# Altium PCB TK522_LV-Trafo.PcbDoc
Units mm, origin at the board's own origin, x right, y up, seen from the top; angles counter-clockwise.
Board outline 70 x 80 mm, 4 copper layers (TopLayer, InternalPlane1, InternalPlane2, BottomLayer); 5 components, 4 nets, 20 pads, 0 vias.
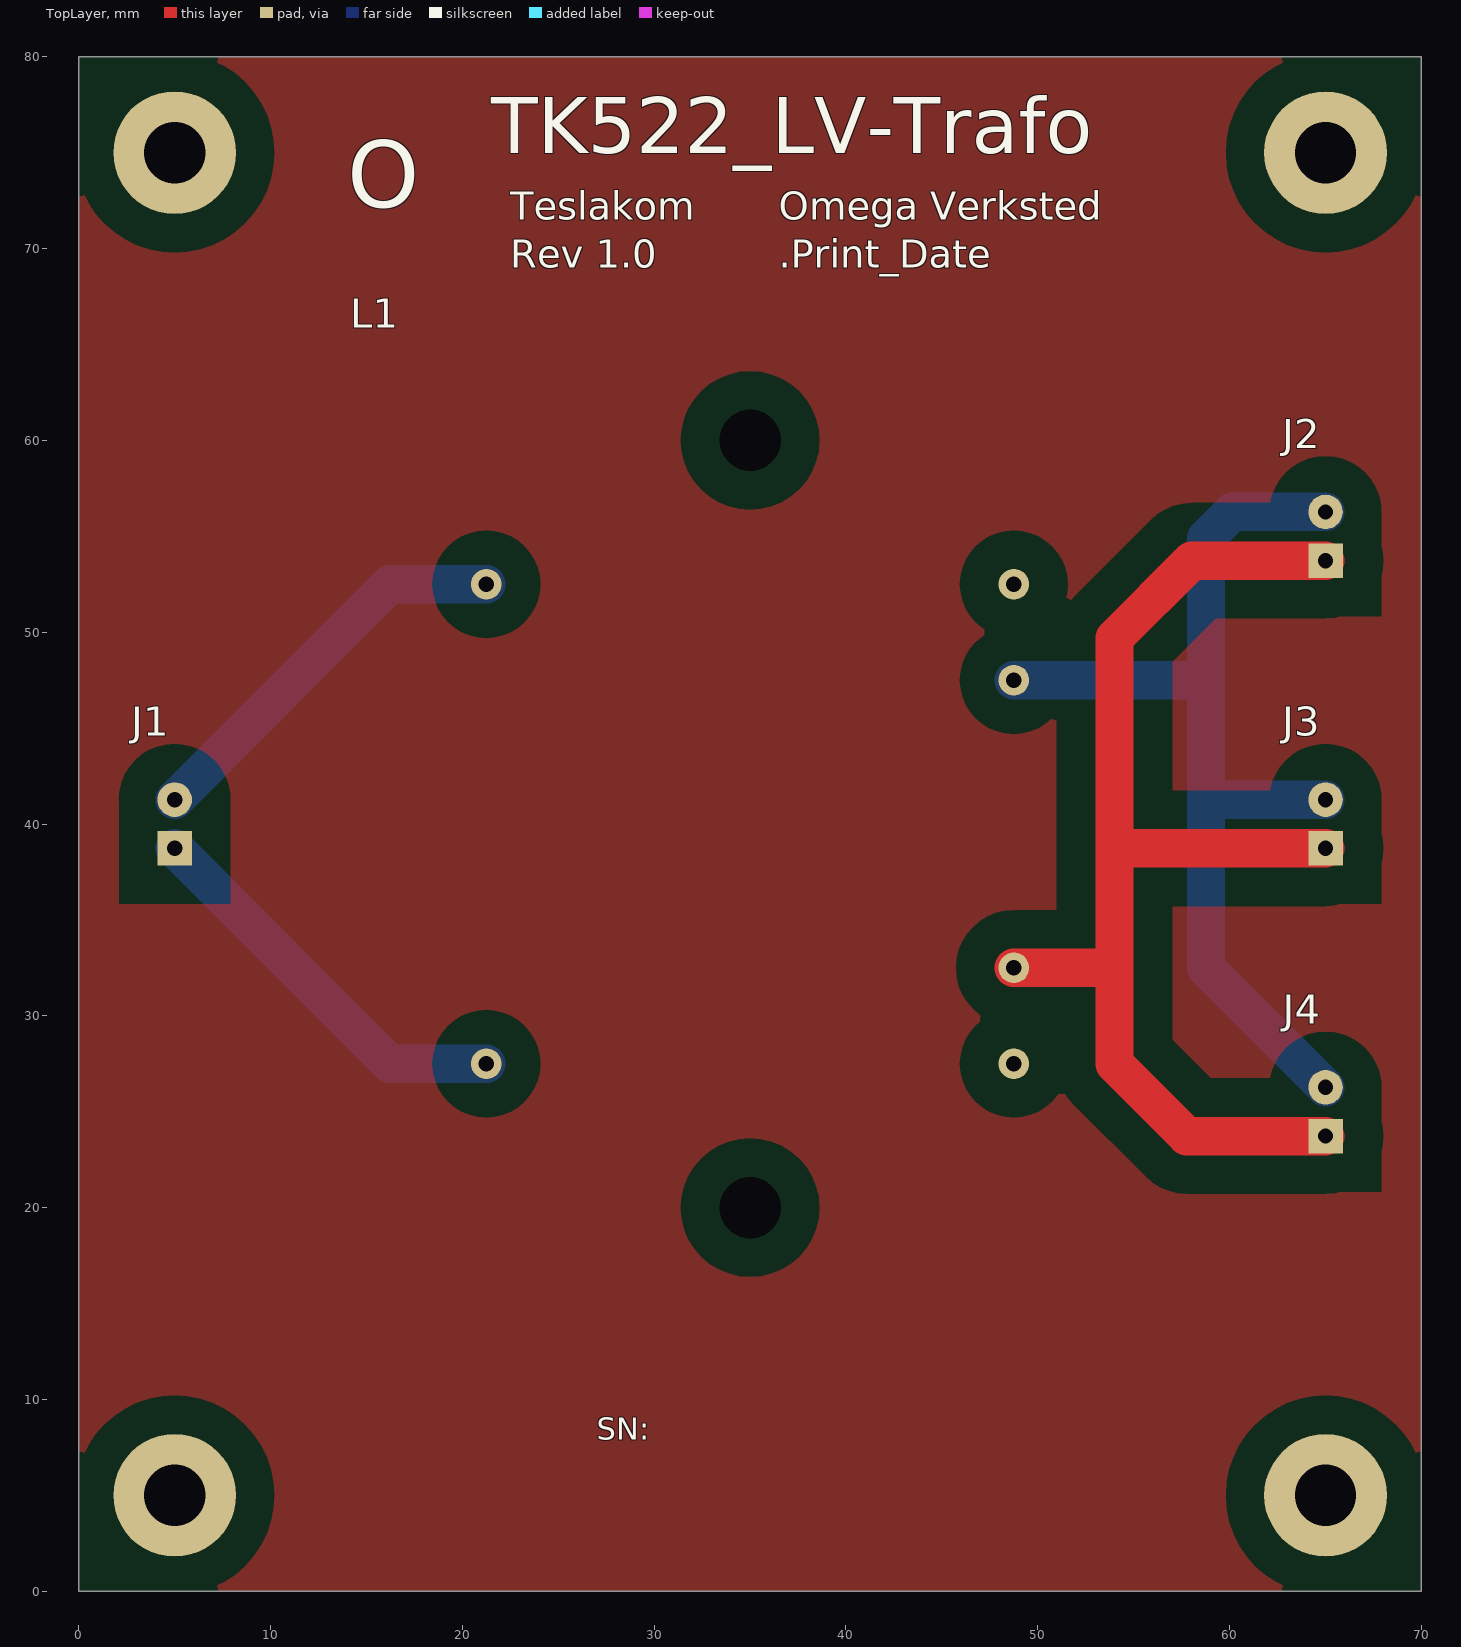
[diagram p0: TopLayer view]
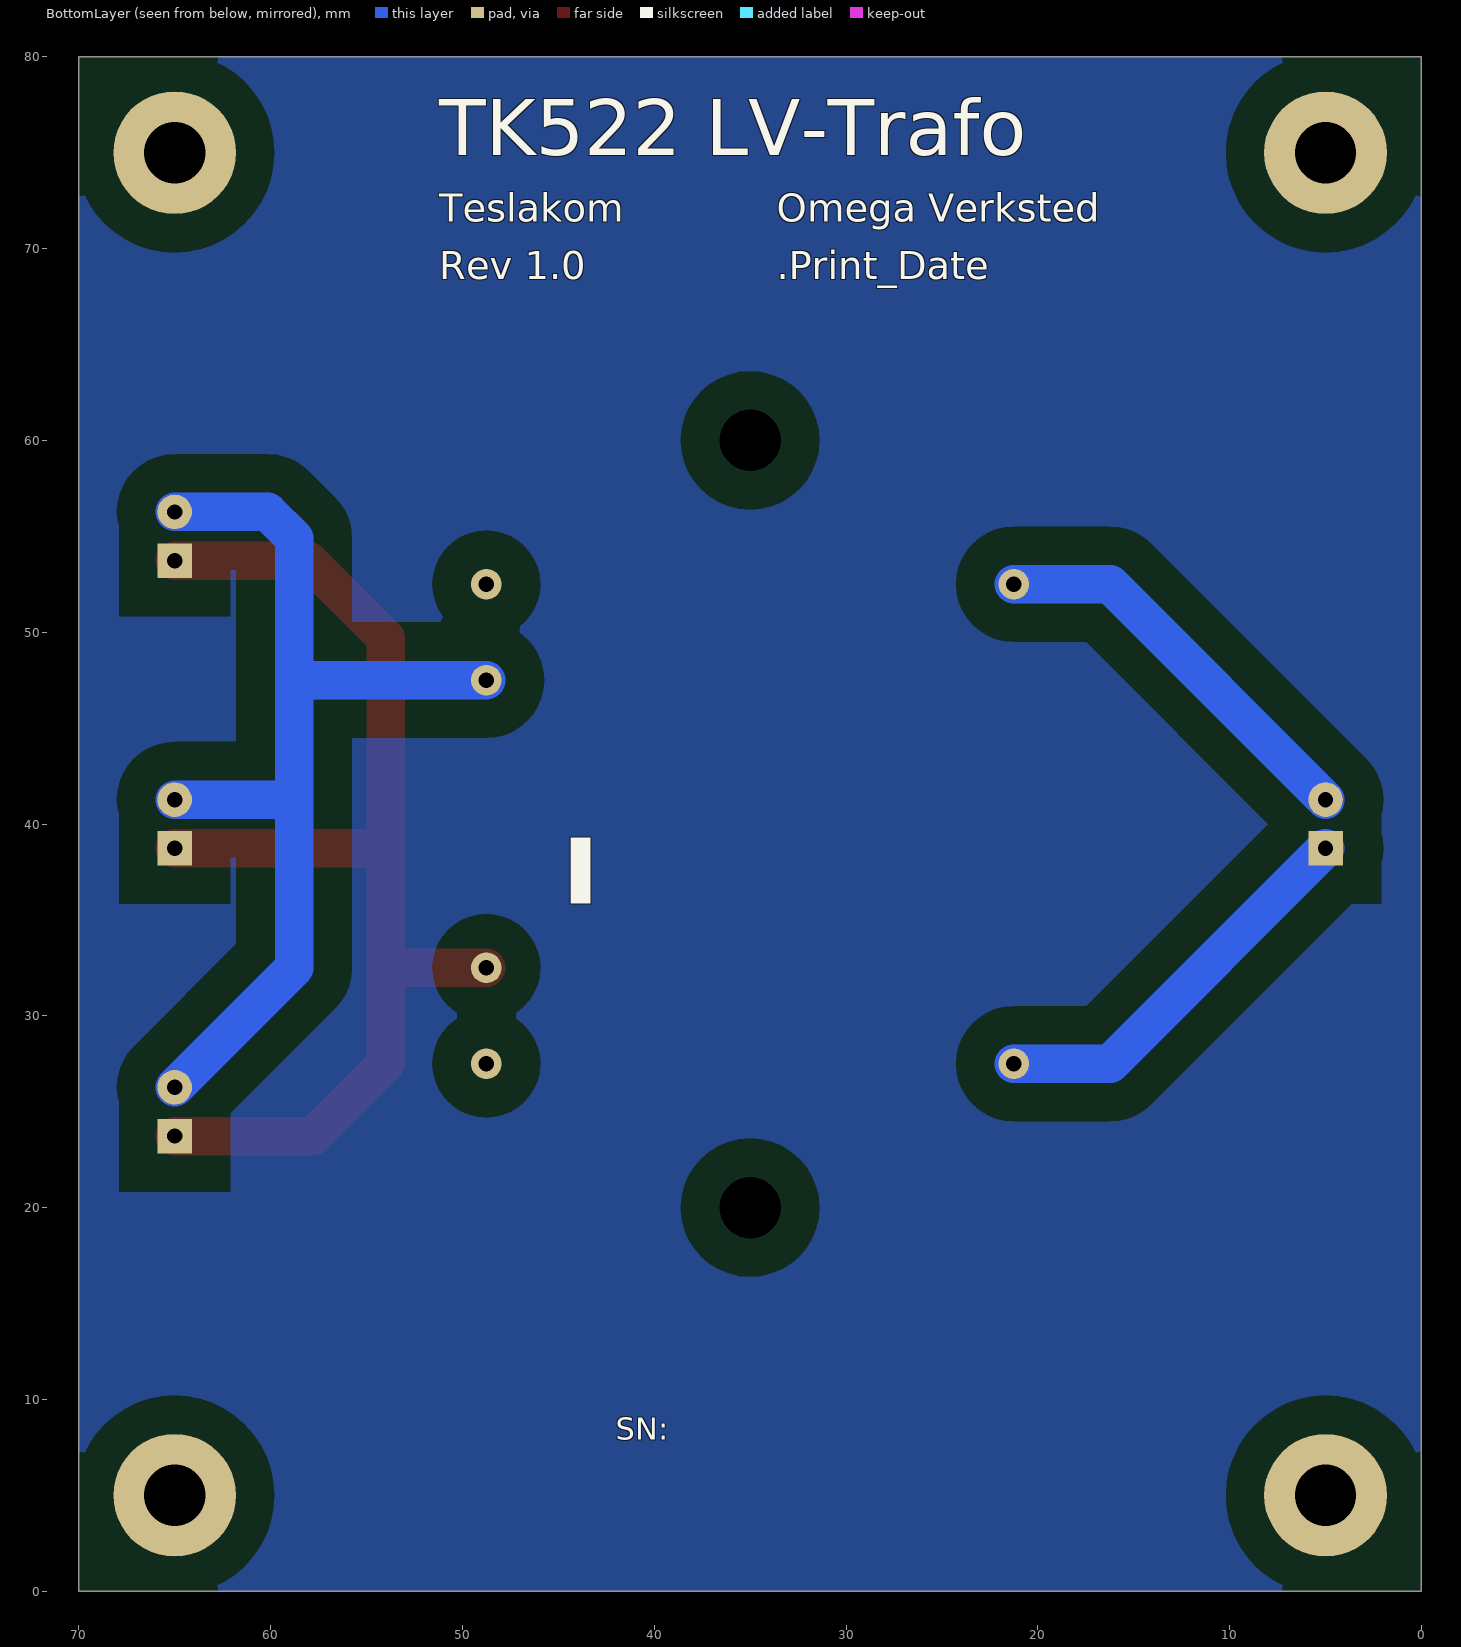
[diagram p1: BottomLayer view, seen from below]
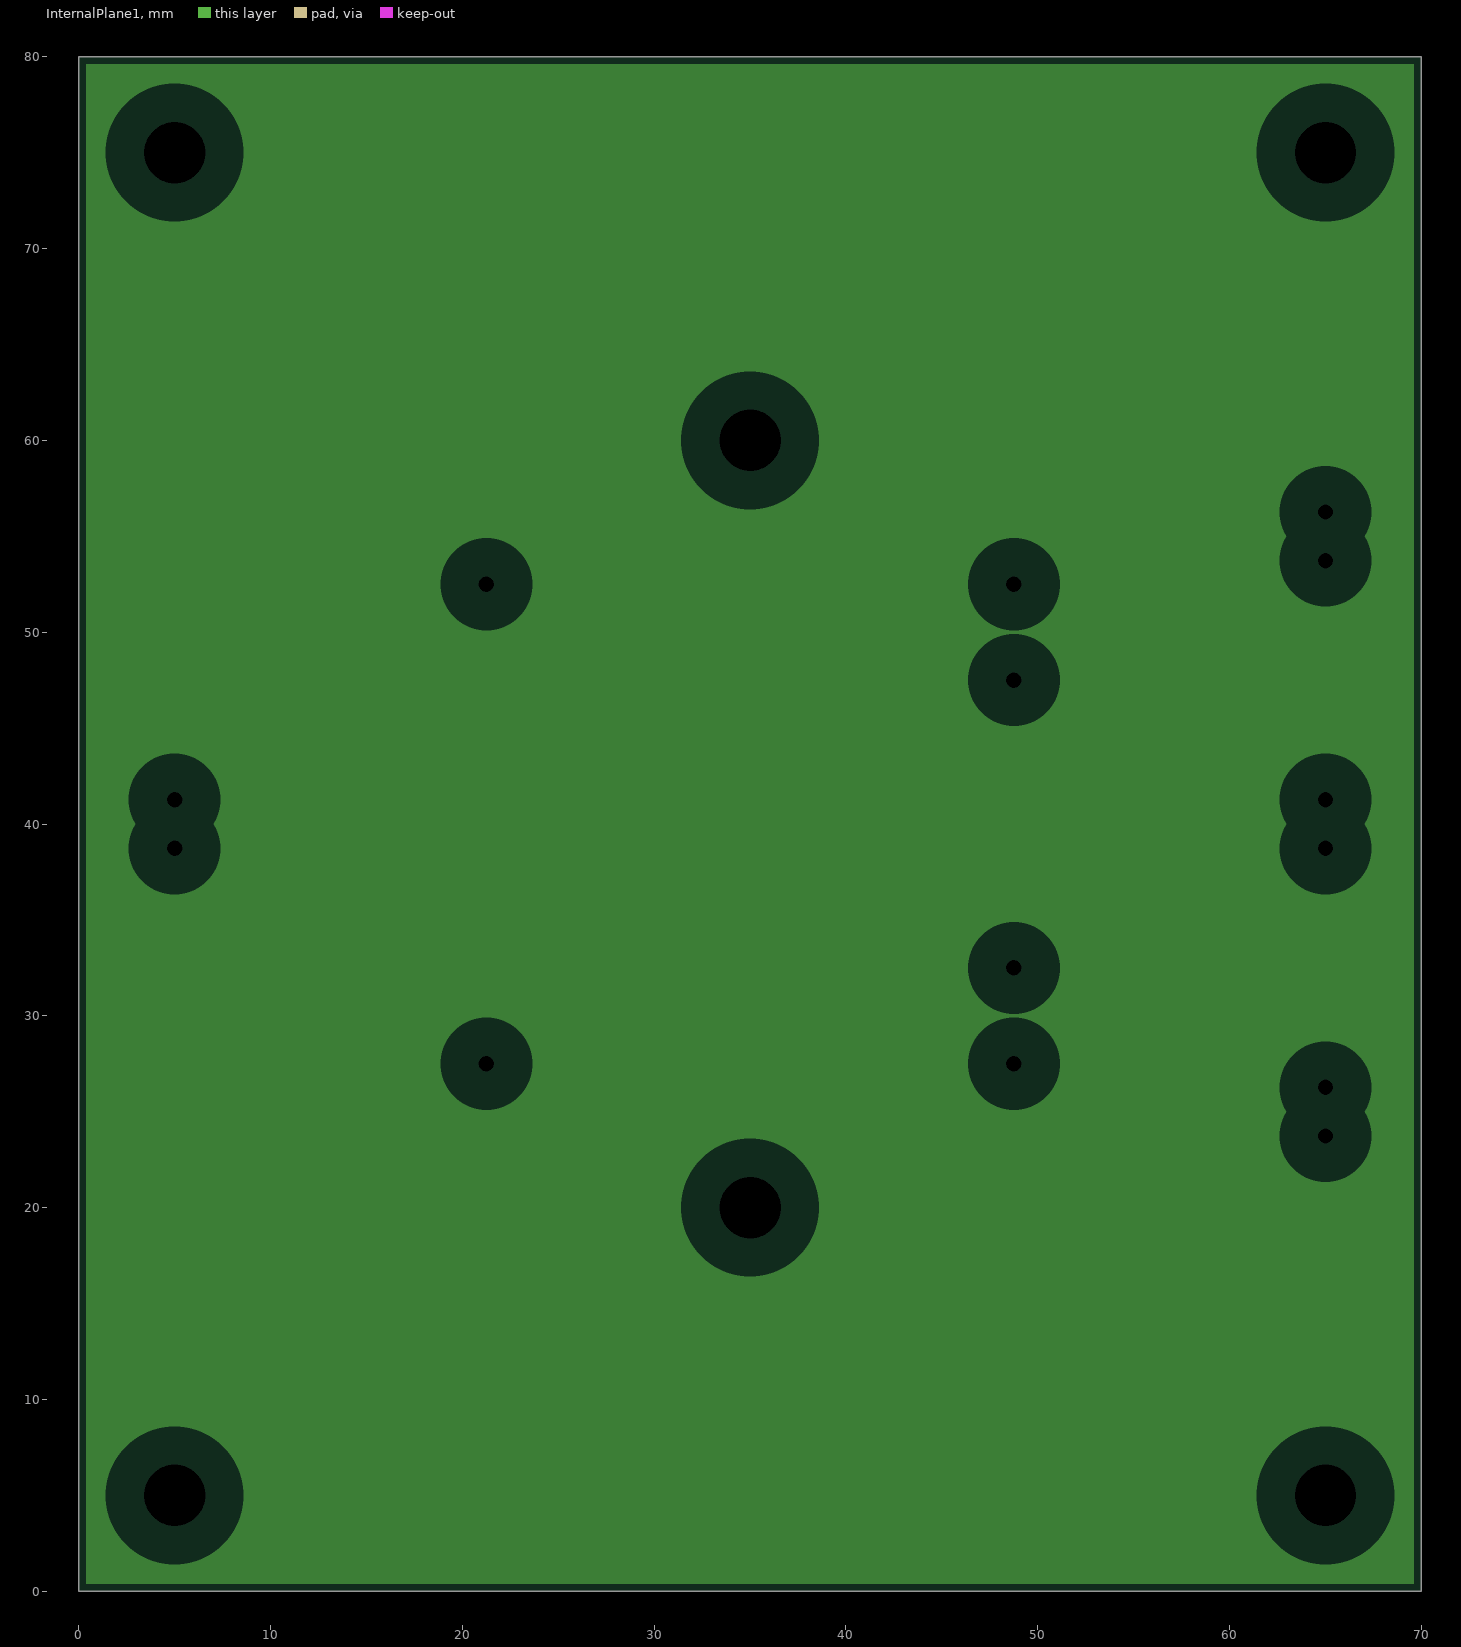
[diagram p2: InternalPlane1, clearances drawn from the general rule]
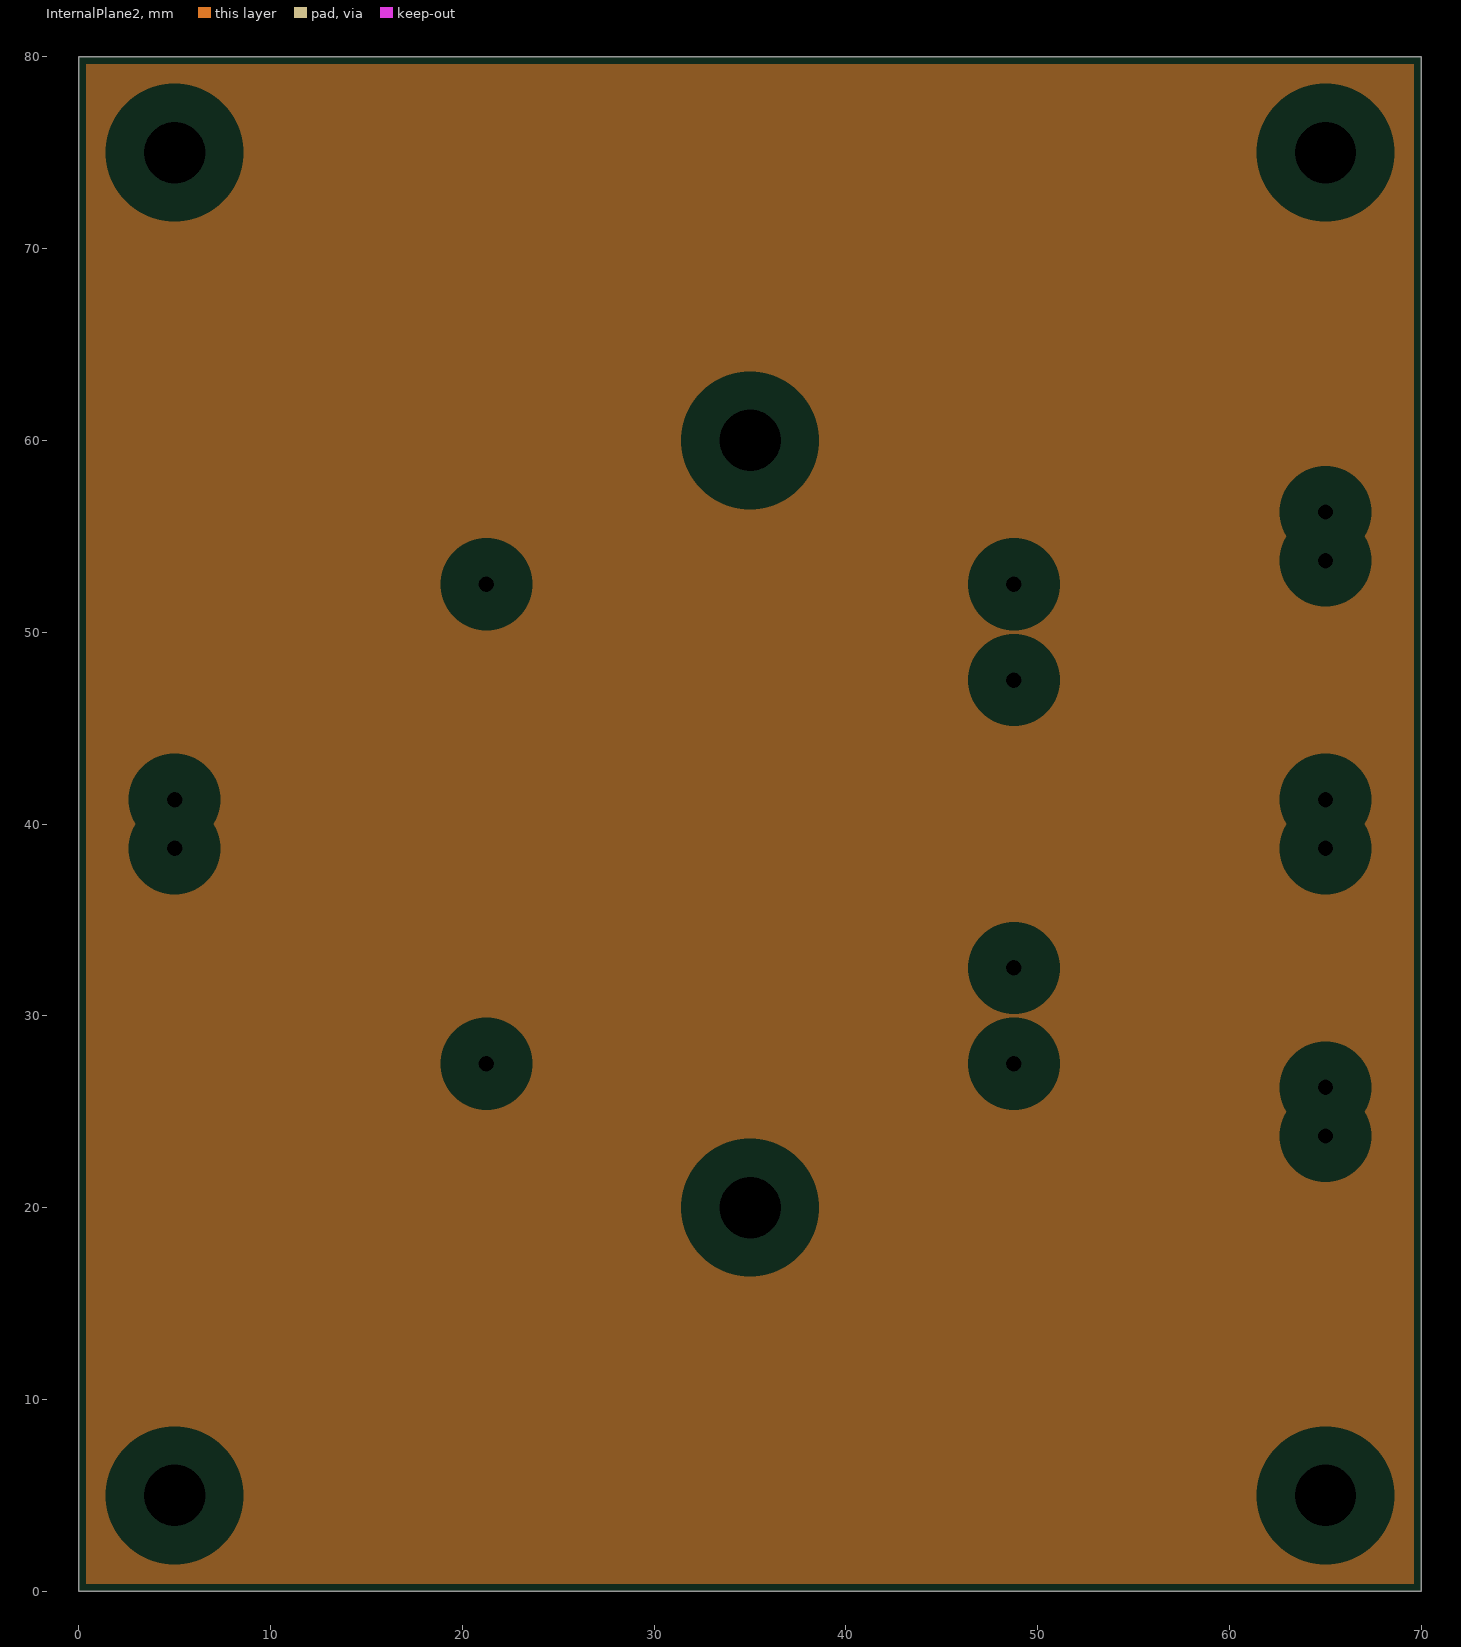
[diagram p3: InternalPlane2, clearances drawn from the general rule]
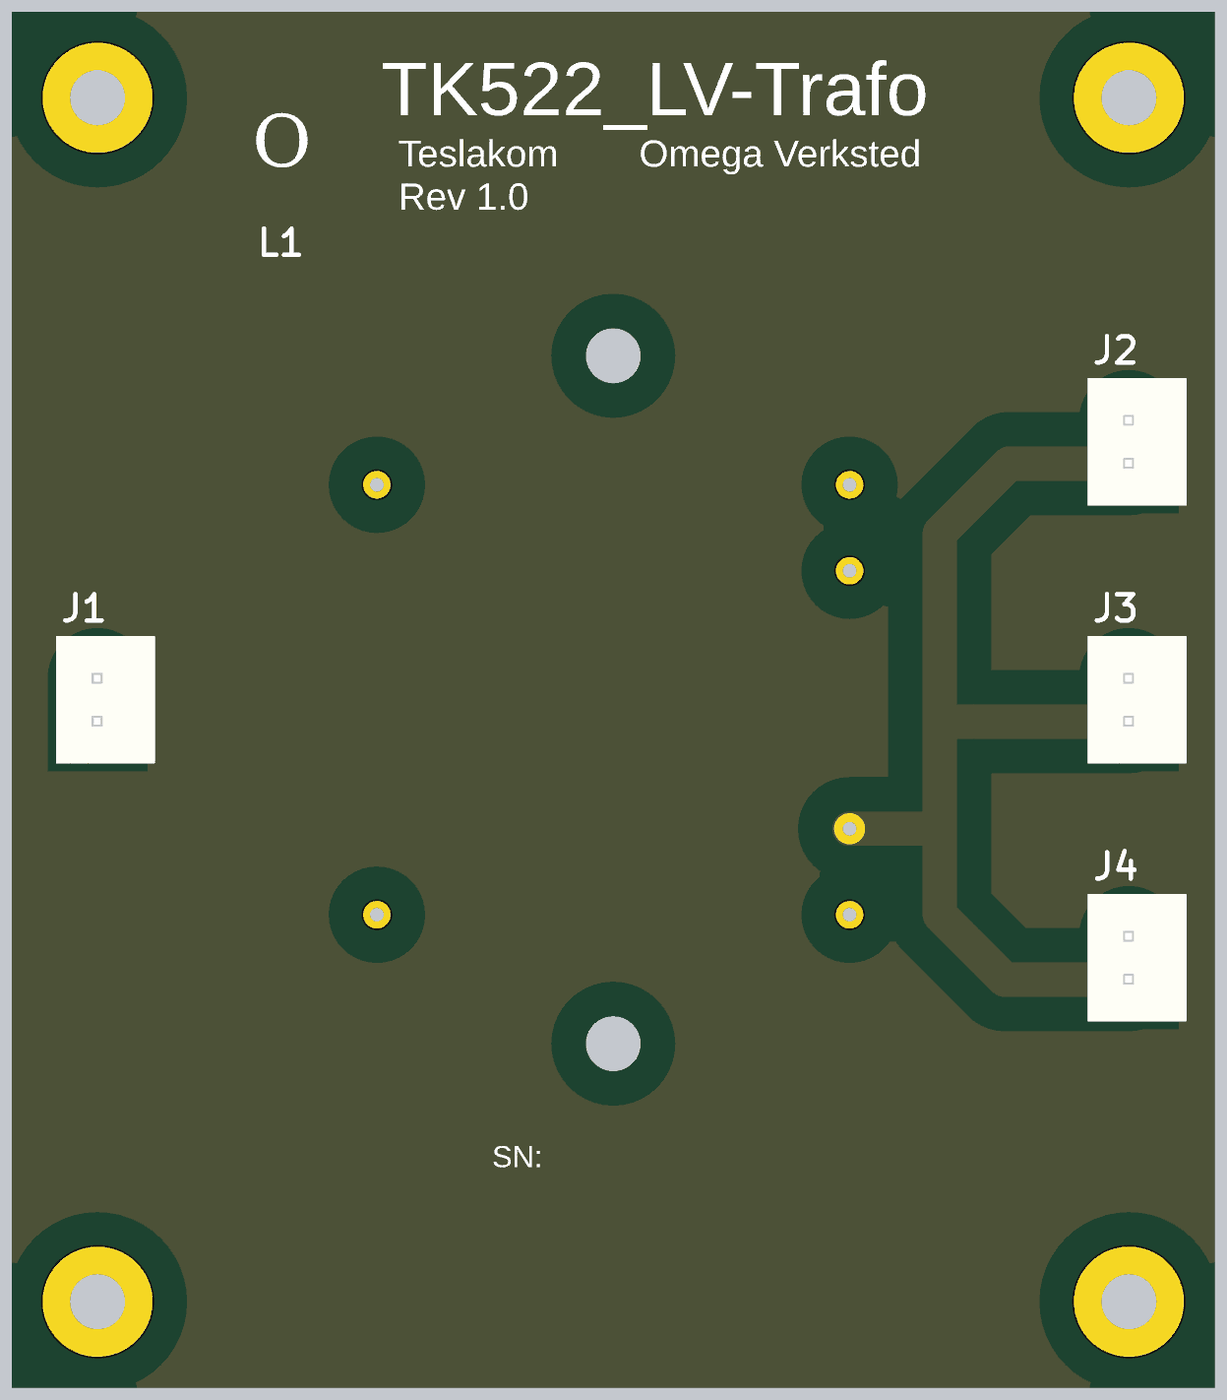
[diagram p4: 3D render of the assembled board from above, using the file's embedded part models]

## Layer stack, top to bottom
TopSolder: solder mask 0.0102, Solder Resist, Dk 3.5
TopLayer: signal copper 0.0178
Dielectric1: core 0.32, FR-4, Dk 4.8
InternalPlane1: plane copper 0.0356
Dielectric2: prepreg 0.32, FR-4, Dk 4.8
InternalPlane2: plane copper 0.0356
Dielectric3: core 0.32, FR-4, Dk 4.8
BottomLayer: signal copper 0.0178
BottomSolder: solder mask 0.0102, Solder Resist, Dk 3.5

## Board outline
0,0 0,80 70,80 70,0

## Design rules (kind name [scope] priority, off if disabled: settings)
Clearance [All] p1: gap=2 ignorepadtopadclearanceinfootprint=FALSE except(0: Arc-Text Arc-Hole Track-Text Track-Hole SMDPad-Text SMDPad-Hole THPad-Text THPad-Hole Via-Text Via-Hole Fill-Text Fill-Hole Poly-Text Poly-Hole Region-Text Region-Hole Text-Text Text-Hole; 0.2: Arc-Arc Arc-Track Arc-THPad Arc-Via Track-Track Track-THPad Track-Via THPad-THPad)
Height [All] p1: minheight=0 maxheight=200 prefheight=12.7
HoleSize [All] p1: absolutevalues=TRUE maxlimit=6.35 minlimit=0.3 maxpercent=80.000 minpercent=20.000
MinimumSolderMaskSliver [All] p1: minsoldermaskwidth=0.1
PlaneClearance [All] p1: clearance=2
PlaneConnect [All] p1: planeconnectstyle=Relief reliefexpansion=0.508 reliefentries=4 reliefconductorwidth=1 reliefairgap=0.254
PolygonConnect TheBestRule [IsVia AND InNet('GND')] p1: connectstyle=Direct reliefconductorwidth=0.4 reliefentries=4 polygonreliefangle="90 Angle" airgapwidth=0.2
PolygonConnect [All] p2: connectstyle=Relief reliefconductorwidth=0.6 reliefentries=4 polygonreliefangle="90 Angle" airgapwidth=0.2
RoutingVias [All] p1: holewidth=0.711 width=1.27 viastyle="Through Hole" minholewidth=0.711 minwidth=1.27 maxholewidth=0.711 maxwidth=1.27
SilkToSolderMaskClearance [IsPad] p1: minsilkscreentomaskgap=0.178 clearancetoexposedcopper=TRUE
SolderMaskExpansion [All] p1: expansion=0.102
Width [All] p1: maxlimit=10 minlimit=0.16 preferedwidth=0.4
24 further rules are at their usual default settings.

## Classes and differential pairs
component class TK522_LV-Trafo: J2 J3 J4 L1

## Components (designator, comment, footprint, x,y, rotation, side; value= is the part's Value field where it differs from the comment)
J1 "B2B-XH-A (LF)(SN)" JST_2P 5,40 r0 top
J2 "B2B-XH-A (LF)(SN)" JST_2P 65,55 r0 top
J3 "B2B-XH-A (LF)(SN)" JST_2P 65,40 r0 top
J4 "B2B-XH-A (LF)(SN)" JST_2P 65,25 r0 top
L1 "navn" "44268 MYRRA TRANSFORMER" 35,40 r90 top

## Footprints (in the part's own frame and the unit in brackets; to place one, negate y for a bottom-side part, rotate by r counter-clockwise, add the part's x,y. Pads: shape width x height; smd on the part's side, far side on the other; paste and mask are expansions set on the pad)
"44268 MYRRA TRANSFORMER" [mm]
  round 1.6 hole 0.8: 1(-12.5,13.75) 6(12.5,13.75) 7(12.5,-13.75) 8(7.5,-13.75) 11(-7.5,-13.75) 12(-12.5,-13.75)
  round 2.5 hole 3.2 unplated: ""(-20,0)
  round 0 hole 3.2 unplated: ""(20,0)
  body extent -25,-21 25,21, height 36
JST_2P [mm]
  rect 1.8x1.8 hole 0.8: 1(0,-1.27)
  round 1.8 hole 0.8: 2(0,1.27)
  body extent -2.4,-3.7 3.35,3.7, height 7

## Part data
J1 J2 J3 J4: library part 2227, antall=170, beskrivelse="JST 2pin (pris pr. stk.)", dybde=2, hylle=0, id=2227, kolonne=0, lager_type=Baklager, leverandor=Farnell, leverandor_varenr=1516276, navn="B2B-XH-A (LF)(SN)", nokkelord="Connector, Kontakt", pakke_opprettet="28.06.2014 18:25:03", pakke_opprettet_av=815, pakketype=TH, pris=2, produsent=JST, rad=1, rom=GM, symbol_opprettet="28.06.2014 15:33:17", symbol_opprettet_av=815
L1: library part "44268 Myrra Transformer", farnell=1689089

## Free pads (board coordinates)
  round 6.4 hole 3.2 unplated: 0(5,5) 0(5,75) 0(65,5) 0(65,75)

## Nets (pads, with @x,y where several pads share a name; then routed paths per layer and width w, separated by ;. In a path a pad name is that pad's centre, name@x,y a point inside that pad or via, vN(x,y) a via of type N, cw(c..) or ccw(c..) an arc to the next point about the centre after c; other vN are vias at no path point)
NetJ1_1: J1.1 L1.1 | length 20.9
  BottomLayer w2: J1.1 16.23,27.5 L1.1
NetJ1_2: J1.2 L1.6 | length 20.9
  BottomLayer w2: J1.2 16.23,52.5 L1.6
NetJ2_1: J2.1 J3.1 J4.1 L1.11 | length 63.7
  TopLayer w2: L1.11 54,32.5 ; J4.1 57.77,23.73 54,27.5 54,32.5 ; J3.1 54.07,38.73 54,38.8 ; J2.1 58.03,53.73 54,49.7 54,38.8 ; 54,32.5 54,38.8
NetJ2_2: J2.2 J3.2 J4.2 L1.8 | length 54.3
  BottomLayer w2: L1.8 58.77,47.5 ; J4.2 58.77,32.5 58.77,41.2 ; J3.2 58.84,41.27 58.77,41.2 ; J2.2 60.14,56.27 58.77,54.9 58.77,47.5 ; 58.77,41.2 58.77,47.5
pads on no net: L1. L1.7 L1.12

## Polygon pours and split planes (outlines as drawn)
no net on BottomLayer "Bottom layer GND" (solid, pour order 4): 0,80 0,0 70,0 70,80
no net on TopLayer "Top layer GND" (solid, pour order 8): 0,80 0,0 70,0 70,80
no net on InternalPlane1 (split plane): 69.617,0.383 0.383,0.383 0.383,79.617 69.617,79.617
no net on InternalPlane2 (split plane): 69.617,0.383 0.383,0.383 0.383,79.617 69.617,79.617

## Silkscreen, mask and mechanical layers (free items; w line width, h text height)
TopOverlay:
  text "TK522_LV-Trafo" at 21.5,74 h5
  text "O" at 14,71 h6
  text "Teslakom" at 22.5,71 h2.5
  text "Omega Verksted" at 36.5,71 h2.5
  text "Rev 1.0" at 22.5,68.5 h2.5
  text ".Print_Date" at 36.5,68.5 h2.5
  text "SN:" at 27,7.5 h2
BottomOverlay:
  text "TK522 LV-Trafo" at 51.2,73.9 h5
  text "Omega Verksted" at 33.6,70.9 h2.5
  text "Teslakom" at 51.2,70.9 h2.5
  text ".Print_Date" at 33.6,67.9 h2.5
  text "Rev 1.0" at 51.2,67.9 h2.5
  text "T" at 47,29.2 h35
  text "SN:" at 42,7.5 h2
PCI-SIG Outline:
  the board outline again, w0.1